# Altium PCB boost.PcbDoc
Units mm, origin at the board's own origin, x right, y up, seen from the top; angles counter-clockwise.
Board outline 84.96 x 55.75 mm, 2 copper layers (Top Layer, Bottom Layer); 34 components, 22 nets, 92 pads, 4 vias.
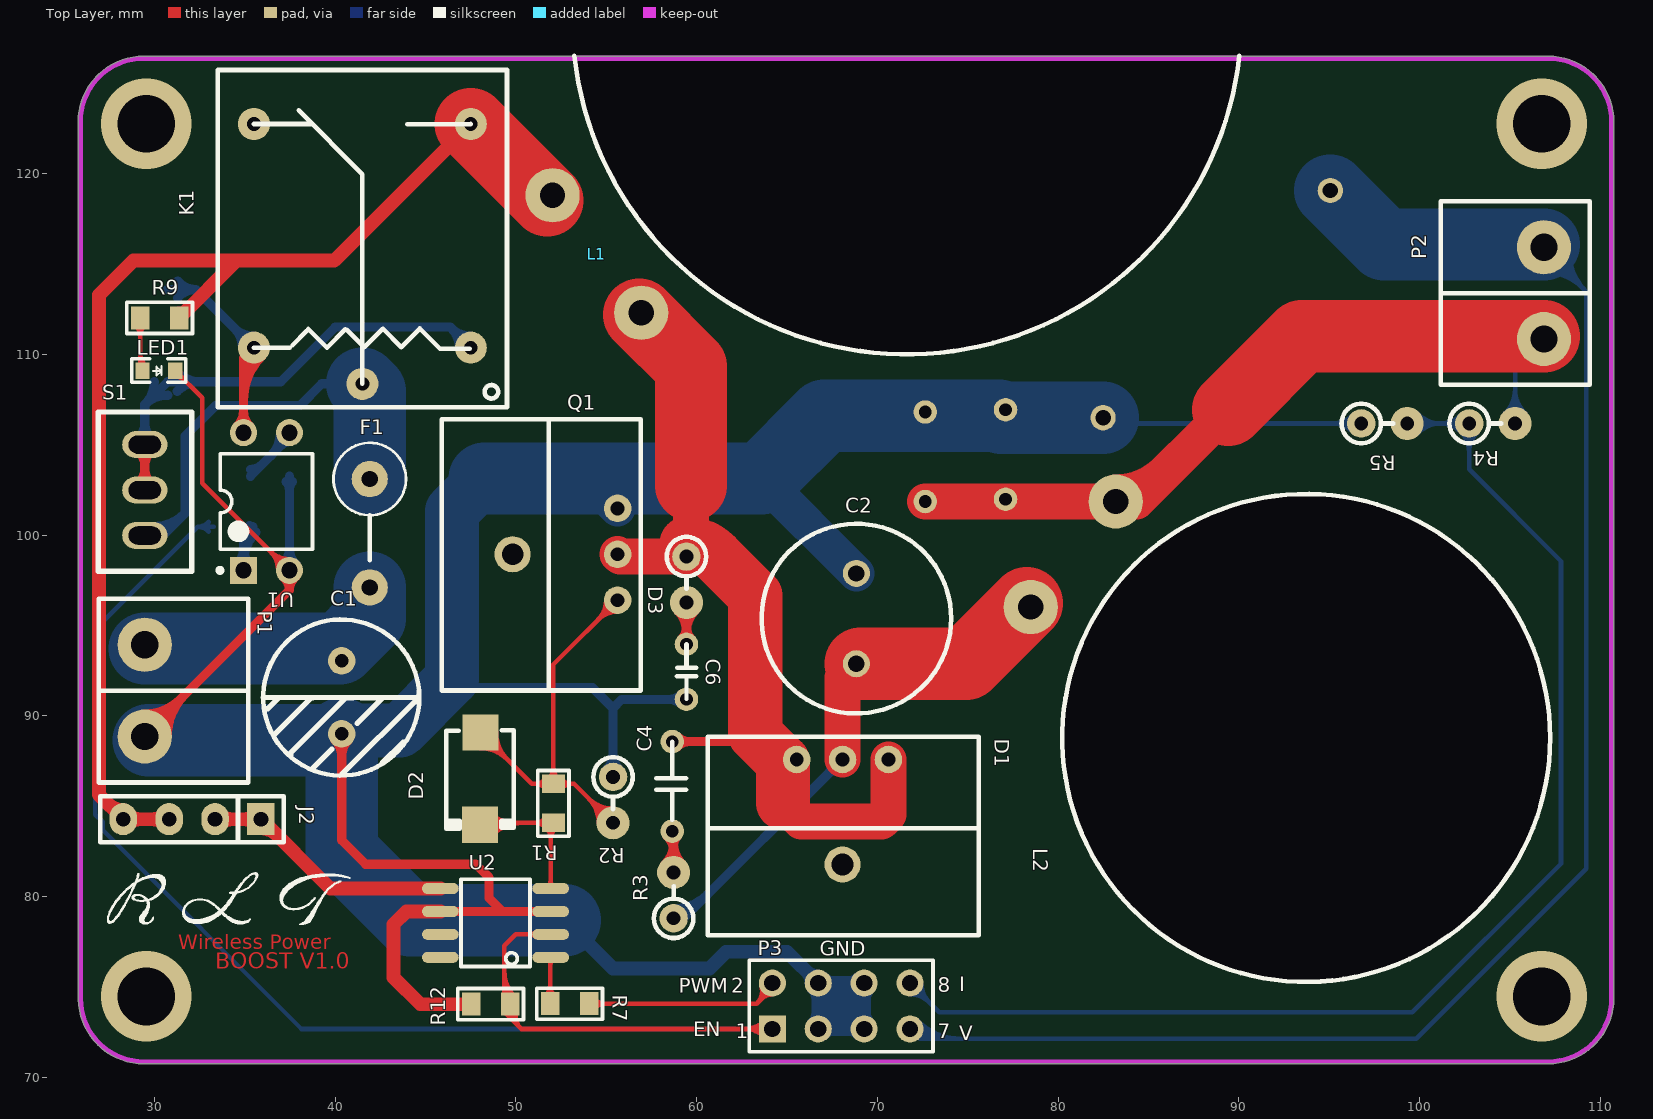
[diagram p0: Top Layer view]
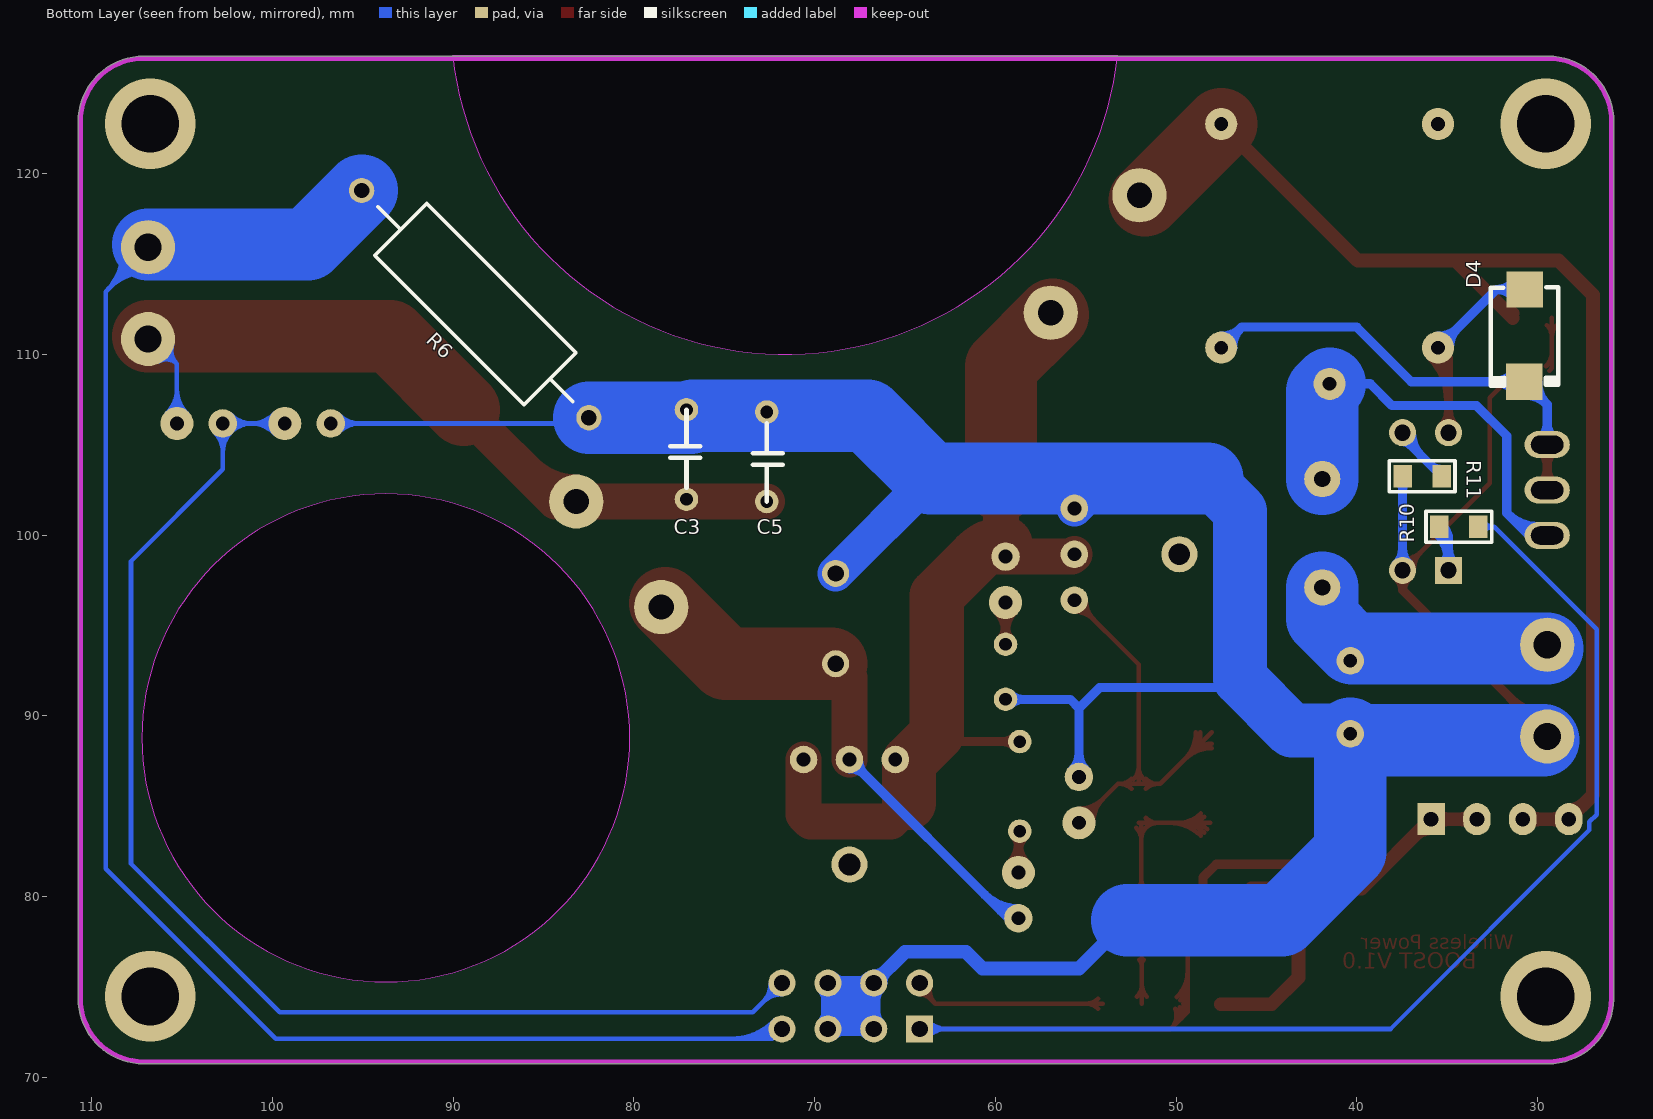
[diagram p1: Bottom Layer view, seen from below]
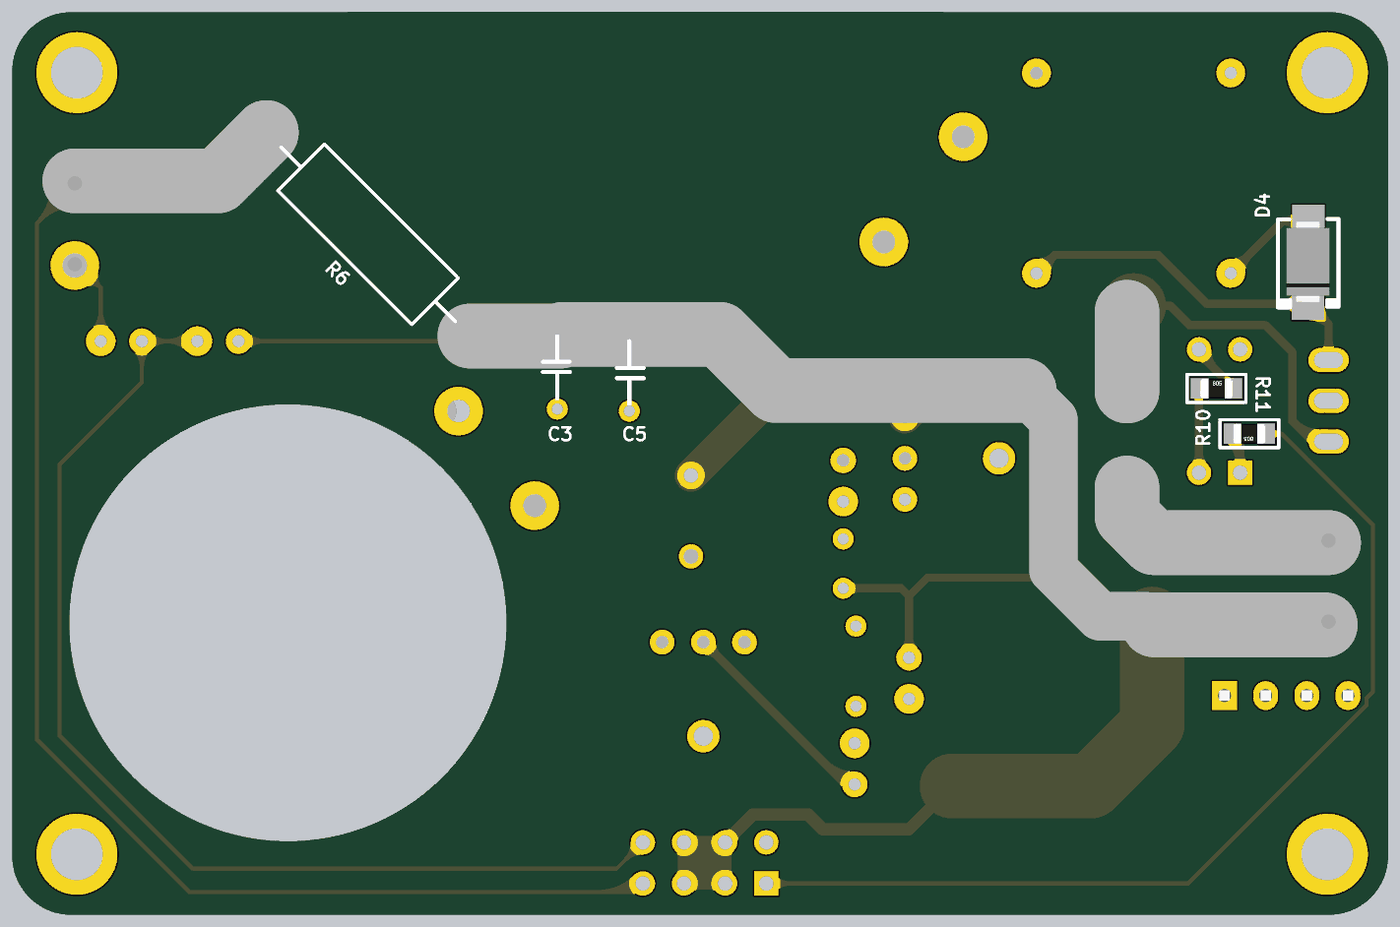
[diagram p2: 3D render of the assembled board from below, using the file's embedded part models]

## Layer stack, top to bottom
Top Solder: solder mask 0.0102, Solder Resist, Dk 3.5
Top Layer: signal copper 0.0356
Dielectric1: dielectric 0.32, FR-4, Dk 4.8
Bottom Layer: signal copper 0.0356
Bottom Solder: solder mask 0.0102, Solder Resist, Dk 3.5

## Board outline
25.781,74.359 25.781,122.86 cw(c25.907,122.872) 25.78,122.872 cw(c29.4,122.872) 29.4,126.493 cw(c29.4,126.366) 29.413,126.492 107.112,126.492 cw(c107.124,126.366) 107.124,126.493 cw(c107.124,122.872) 110.745,122.872 cw(c110.618,122.872) 110.744,122.86 110.744,74.371 cw(c110.618,74.358) 110.745,74.358 cw(c107.124,74.358) 107.124,70.738 cw(c107.124,70.865) 107.112,70.739 29.413,70.739 cw(c29.413,74.359) 25.793,74.304 cw(c25.908,74.359)

## Design rules (kind name [scope] priority, off if disabled: settings)
Clearance [All] p1: gap=0.254
PolygonConnect [All] p1: connectstyle=Relief reliefconductorwidth=0.254 reliefentries=4 polygonreliefangle="90 Angle" airgapwidth=0.254
RoutingVias [All] p1: holewidth=0.711 width=1.27 viastyle="Through Hole" minholewidth=0.711 minwidth=1.27 maxholewidth=0.711 maxwidth=1.27
SolderMaskExpansion [All] p1: expansion=0.102
Width [All] p1: maxlimit=5 minlimit=0.254 preferedwidth=0.254 minimp=50.000000 maximp=50.000000 favimp=50.000000
29 further rules are at their usual default settings.

## Classes and differential pairs
component class boost_sheet: C6 D2 D3 D4 F1 K1 L1 L2 Q1 R5 R6 R7 R9 R10 R12

## Components (designator, comment, footprint, x,y, rotation, side; value= is the part's Value field where it differs from the comment)
C1 "Cap Pol1" Elector_470uf_8*9/12*3mm 40.361,91.008 r270 top
C2 "Cap Pol1" RB5-10.5 68.834,95.377 r90 top
C3 "Cap" cb2 77.089,101.981 r90 bottom
C4 "Cap" CB2 58.649,83.617 r90 top
C5 "Cap" cb2 72.644,106.807 r270 bottom
C6 "Cap" CB1 59.436,90.907 r90 top
D1 "MBR20150" LM317带散热片 68.072,87.579 r0 top
D2 "SS14" SK34-SMB/DO-214AA 48.006,83.947 r90 top
D3 "IN4007" AXIAL0.1Z 59.436,98.806 r270 top
D4 "SS14" SK34-SMB/DO-214AA 30.734,108.458 r90 bottom
F1 "Fuse 1" FUSE-L 41.91,103.099 r90 top
J2 "CON4" SIP4 32.08,84.277 r180 top
K1 "HHC66A-1Z-12VDC" HHC66A-1Z-12VDC电位器 38.608,114.554 r180 top
L1 "Inductor" BOOST升压电感2 71.628,128.499 r0 top
L2 "Inductor" BOOST电路滤波电感 93.726,88.773 r270 top
LED1 "" 0603_LED 29.337,109.093 r0 top
P1 "VCC" 050-2 29.464,91.389 r90 top
P2 "VCC" 050-2 106.883,113.386 r270 top
P3 "Header 4X2" HDR2X4 64.186,72.669 r0 top
Q1 "IRFB4115PBF" LM317带散热片 55.626,98.933 r270 top
R1 "Res1" 0805r 52.07,84.074 r90 top
R2 "Res1" AXIAL0.1Z 55.372,86.614 r270 top
R3 "Res1" AXIAL0.1Z 58.725,78.791 r90 top
R4 "Res1" AXIAL0.1Z 102.743,106.172 r0 top
R5 "Res1" AXIAL0.1Z 96.774,106.172 r0 top
R6 "Res1" AXIAL-0.7 88.773,112.776 r225 bottom
R7 "Res1" 0805r 54.051,74.066 r180 top
R9 "2K" 0805R 29.21,112.014 r0 top
R10 "Res1" 0805R 33.274,100.457 r0 bottom
R11 "Res1" 0805R 37.465,103.251 r180 bottom
R12 "Res1" 0805R 47.523,74.041 r0 top
S1 "switch1" Switch_8.2*5.2 29.464,102.489 r180 top
U1 "Optoisolator1" DIP-4 36.195,101.854 r90 top
U2 "IR2184s" SO-8NB 48.844,78.537 r90 top

## Footprints (in the part's own frame and the unit in brackets; to place one, negate y for a bottom-side part, rotate by r counter-clockwise, add the part's x,y. Pads: shape width x height; smd on the part's side, far side on the other; paste and mask are expansions set on the pad)
050-2 [mm]
  round 3 hole 1.5: 1(-2.54,0) 2(2.54,0)
  silkscreen extent -5.08,-5.71 5.08,2.54, body extent -5.04,-5.5 4.96,2.5, height 11.2
0603_LED [mm]
  rect 0.8x0.9 smd: 1(0,0) 2(1.8,0)
  silkscreen extent -0.6,-0.65 2.4,0.65, body extent 0.05,-0.37 1.67,0.43, height 0.6
0805r [mil]
  rect 40x50 smd: 1(0,0) 2(85,0)
  silkscreen extent -29,-34 114,34, body extent 3,-25 82,25, height 30
0805R [mil]
  rect 40x50 smd: 1(0,0) 2(85,0)
  silkscreen extent -29,-34 114,34, body extent 3,-25 82,25, height 30
AXIAL0.1Z [mil]
  round 62 hole 30: 1(0,0)
  round 72 hole 30: 2(100,0)
  silkscreen extent -43,-43 70,43
AXIAL-0.7 [mm] "Axial Device, Thru-Hole; 2 Leads; 0.7 in Pin Spacing"
  round 1.4 hole 0.85: 1(-8.89,0) 2(8.89,0)
  silkscreen extent -7.62,-2.03 7.62,2.03
BOOST升压电感2 [mm]
  round 3 hole 1.4: 1(-19.6,-9.7) 2(-14.7,-16.2)
  Keep-Out Layer board cut-out: -18.394,-1.978 18.394,-1.978 15.321,-10.369 8.672,-16.341 0,-18.5 -8.672,-16.341 -15.321,-10.369 -18.394,-1.978
  silkscreen extent -18.39,-18.5 18.39,-1.98
BOOST电路滤波电感 [mm]
  round 3 hole 1.4: 1(-7.239,-15.24) 2(-13.081,-10.541)
  Keep-Out Layer board cut-out: 0,-13.5 -5.166,-12.472 -9.546,-9.546 -12.472,-5.166 -13.5,0 -13.5,0 -12.472,5.166 -9.546,9.546 -5.166,12.472 0,13.5 0,13.5 5.166,12.472 9.546,9.546 12.472,5.166 13.5,0 13.5,0 12.472,-5.166 9.546,-9.546 5.166,-12.472 0,-13.5
  silkscreen extent -13.5,-13.5 13.5,13.5
CB1 [mm]
  round 1.3 hole 0.7: 1(0,0) 2(3.048,0)
  silkscreen extent 0,-0.55 3.05,0.52
cb2 [mm]
  round 1.3 hole 0.7: 1(0,0) 2(4.953,0)
  silkscreen extent 0.64,-0.76 4.95,0.89
CB2 [mm]
  round 1.3 hole 0.7: 1(0,0) 2(4.953,0)
  silkscreen extent 0.64,-0.76 4.95,0.89
DIP-4 [mm] "DIP; 4 Leads; Row Spacing 7.62 mm; Pitch 2.54 mm"
  rect 1.5x1.5 hole 0.9: 1(-3.81,1.27)
  round 1.5 hole 0.9: 2(-3.81,-1.27) 3(3.81,-1.27) 4(3.81,1.27)
  silkscreen extent -3.93,-2.55 2.65,2.69, body extent -3.15,-2.5 3.15,2.5, height 5.6
Elector_470uf_8*9/12*3mm [mil]
  round 60 hole 30: 1(-80,0) 2(79,0)
  silkscreen extent -170,-171 170,169
FUSE-L [mil]
  round 79 hole 35.43: 1(-236.22,0) 2(0,0)
  silkscreen extent -177,-79 79,79, body extent -249,-74 78,83, height 545
HDR2X4 [mm] "Connector; Header; 4x2 Position"
  rect 1.5x1.5 hole 0.9: 1(0,0)
  round 1.5 hole 0.9: 2(0,2.54) 3(2.54,0) 4(2.54,2.54) 5(5.08,0) 6(5.08,2.54) 7(7.62,0) 8(7.62,2.54)
  silkscreen extent -1.27,-1.27 8.89,3.81
HHC66A-1Z-12VDC电位器 [mil]
  round 70 hole 30: 1(-113.98,243.62) 2(122.24,-322.36) 3(-350.2,-322.36) A(-350.2,164.88) B(122.24,164.88)
  silkscreen extent -429,-440 201,295
LM317带散热片 [mil]
  round 60 hole 30: 1(100,0) 2(0,0) 3(-100,0)
  round 78.74 hole 47.24: 4(0,-228.74)
  silkscreen extent -294,-383 297,50
RB5-10.5 [mm] "Capacitor (Radial); 2 Leads"
  round 1.5 hole 0.9: 1(-2.5,0) 2(2.5,0)
  silkscreen extent -5.25,-5.25 5.25,5.25
SIP4 [mil]
  rect 60x70 hole 32: 1(-150,0)
  oval 60x70 hole 32: 2(-50,0) 3(50,0) 4(150,0)
  silkscreen extent -200,-50 200,50, body extent -200,-50 200,50, height 336
SK34-SMB/DO-214AA [mm]
  rect 2x2 smd: 1(5.131,-0.025) 2(0.025,0)
  silkscreen extent -0.2,-1.88 5.26,1.85, body extent 0.06,-1.33 5.17,1.33, height 2.12
SO-8NB [mil]
  oval 24x80 smd: 1(-75,-121) 2(-25,-121) 3(25,-121) 4(75,-121) 5(75,119) 6(25,119) 7(-25,119) 8(-75,119)
  silkscreen extent -95,-76 95,74, body extent -97,-119 96,117, height 61
Switch_8.2*5.2 [mm]
  oval 2.5x1.5 hole 1 slot 1.8 at 0 deg: 1(0,2.515) 2(0,0) 2(0,-2.515)
  silkscreen extent -2.59,-4.32 2.57,4.5

## Part data
C1 C2: "Polarized Capacitor (Radial)"
C3: library part "Cap Pol1", "Polarized Capacitor (Radial)"
C4 C5 C6: "Capacitor"
D2 D3 D4: library part Diode, "Default Diode"
F1: "Fuse"
J2: "Connector"
LED1: library part LED2, "Typical RED, GREEN, YELLOW, AMBER GaAs LED"
P1 P2: library part POWER
P3: "Header, 4-Pin, Dual row"
R1 R2 R3 R4 R5 R6 R7 R10 R11 R12: "Resistor"
R9: library part RES
U1: "4-Pin Phototransistor Optocoupler"

## Via types
v1: diameter 5, hole 3.2, Top Layer to Bottom Layer, 4 vias

## Nets (pads, with @x,y where several pads share a name; then routed paths per layer and width w, separated by ;. In a path a pad name is that pad's centre, name@x,y a point inside that pad or via, vN(x,y) a via of type N, cw(c..) or ccw(c..) an arc to the next point about the centre after c; other vN are vias at no path point)
+12: J2.3 J2.4 K1.3 L1.1 R9.2 | length 73.3
  Top Layer w0.762: 27.403,85.144 ccw(c28.27,86.012) J2.4@28.27,84.785 ; J2.4@28.54,84.008 cw(c29.19,83.357) 29.19,84.277 cw(c29.19,85.197) J2.4@28.54,84.547 ; J2.3@30.541,84.008 ccw(c29.89,83.357) 29.89,84.277 ccw(c29.89,85.197) J2.3@30.541,84.547 ; J2.3 J2.4 26.924,85.623 26.924,113.284 28.829,115.189 34.544,115.189 ; R9.2 34.544,115.189 ; R9.2@31.369,112.268 ccw(c31.369,112.881) R9.2@31.803,112.448 ; K1.3@46.995,122.742 cw(c45.769,122.742) 46.636,121.875 cw(c47.503,121.008) K1.3@47.503,122.234 ; K1.3 39.95,115.189 34.544,115.189
  Top Layer w4: K1.3 L1.1@51.737,118.508
GND: C1.2 C2.2 C3.2 C5.1 C6.1 LED1.2 P1.1 P3.3 P3.4 P3.5 P3.6 Q1.3 R2.1 R5.1 R6.2 R11.1 R12.1 U1.2 U2.3 U2.6 | length 262.3
  Top Layer w0.254: LED1.2@31.137,108.77 cw(c31.137,107.99) 31.688,108.542 ; LED1.2 32.639,107.591 32.639,102.87 U1.2 ; LED1.2@31.41,109.043 ccw(c31.948,109.043) 31.568,108.662 ; U1.2@36.842,98.044 ccw(c35.338,98.044) 36.401,99.108 ccw(c37.465,100.171) U1.2@37.465,98.667 ; U1.2@37.096,98.044 ccw(c36.205,98.044) 36.835,98.674 ccw(c37.465,99.304) U1.2@37.465,98.413
  Top Layer w0.508: P1.1@29.464,89.587 ccw(c29.464,91.124) 30.55,90.037 ; P1.1@29.464,90.095 ccw(c29.464,92.858) 31.418,90.904 ; P1.1@29.629,88.849 29.629,89.116 37.465,96.952 ; P1.1@30.202,88.849 cw(c32.229,88.849) 30.796,90.282 ; P1.1@30.71,88.849 cw(c33.963,88.849) 31.663,91.15 ; U1.2@37.139,97.671 cw(c36.511,96.952) 37.465,96.952 ; U1.2 37.465,96.952 ; U1.2@37.791,97.671 ccw(c38.419,96.952) 37.465,96.952 ; C1.2@40.001,88.642 cw(c39.134,87.775) 40.361,87.775 cw(c41.587,87.775) C1.2@40.72,88.642 ; C1.2 40.361,83.109 41.681,81.788 47.777,81.788 48.514,81.051 48.514,79.908 49.251,79.172 ; U2.6 49.251,79.172 ; U2.3 49.251,79.172
  Top Layer w0.762: U2.6 43.942,79.172 43.231,78.461 43.231,75.514 44.704,74.041 R12.1
  Bottom Layer w0.254: R6.2 82.805,106.172 R5.1 ; R6.2@82.533,106.536 ccw(c83.411,107.414) 83.411,106.172 ; R6.2@82.712,106.715 ccw(c84.024,108.027) 84.024,106.172 ; R6.2@82.892,106.895 ccw(c84.637,108.64) 84.637,106.172 ; R5.1@96.307,105.705 ccw(c95.18,104.578) 95.18,106.172 ccw(c95.18,107.766) R5.1@96.307,106.639 ; R5.1@96.487,105.885 ccw(c95.793,105.191) 95.793,106.172 ccw(c95.793,107.153) R5.1@96.487,106.459
  Bottom Layer w0.508: U1.2@37.114,98.395 ccw(c36.268,99.241) 37.465,99.241 ccw(c38.662,99.241) U1.2@37.816,98.395 ; R11.1@37.285,102.944 cw(c36.852,102.511) 37.465,102.511 cw(c38.078,102.511) R11.1@37.645,102.944 ; U1.2 R11.1 ; 45.974,91.567 54.229,91.567 55.372,90.424 ; R2.1@54.995,86.991 ccw(c54.084,87.902) 55.372,87.902 ccw(c56.66,87.902) R2.1@55.749,86.991 ; R2.1 55.372,90.424 ; C6.1@59.156,90.627 ccw(c58.48,89.951) 58.48,90.907 ccw(c58.48,91.863) C6.1@59.156,91.187 ; C6.1 55.855,90.907 55.372,90.424
  Bottom Layer w0.762: 52.705,78.689 55.372,76.022 60.706,76.022 61.62,76.937 64.999,76.937 P3.4 ; P3.4@66.357,75.209 ccw(c65.466,75.209) 66.096,75.839 ccw(c66.726,76.469) P3.4@66.726,75.578 ; P3.3@66.465,72.93 ccw(c65.835,73.56) 66.726,73.56 ccw(c67.617,73.56) 66.987,72.93 ccw(c67.617,73.56) 67.617,72.669 ccw(c67.617,71.779) P3.3@66.987,72.408 ; P3.4@66.465,74.948 cw(c65.835,74.319) 66.726,74.319 cw(c67.617,74.319) 66.987,74.948 cw(c67.617,74.319) 67.617,75.209 cw(c67.617,76.1) P3.4@66.987,75.47 ; P3.5@69.005,72.408 ccw(c68.375,71.779) 68.375,72.669 ccw(c68.375,73.56) 69.005,72.93 ccw(c68.375,73.56) 69.266,73.56 ccw(c70.157,73.56) P3.5@69.527,72.93 ; P3.6@69.005,75.47 cw(c68.375,76.1) 68.375,75.209 cw(c68.375,74.319) 69.005,74.948 cw(c68.375,74.319) 69.266,74.319 cw(c70.157,74.319) P3.6@69.527,74.948 ; P3.4 P3.6 P3.5 P3.3 P3.4
  Bottom Layer w2: 53.975,103.124 Q1.3 ; 63.587,103.124 C2.2
  Bottom Layer w3: C1.2@40.767,89.179 43.586,89.179 46.457,92.05 46.457,101.321 48.26,103.124
  Bottom Layer w4: P1.1@29.667,88.646 C1.2@40.234,88.646 ; C1.2 40.361,82.474 44.145,78.689 52.705,78.689 ; 48.26,103.124 53.975,103.124 63.587,103.124 67.056,106.593 C3.2@76.748,106.593 ; C3.2@76.851,106.49 R6.2
NetC1_1: C1.1 F1.1 P1.2 | length 14.9
  Bottom Layer w4: P1.2@29.464,93.726 40.259,93.726 41.91,95.377 F1.1
NetC2_1: C2.1 D1.2 L2.1 R3.1 | length 34.8
  Top Layer w2: D1.2 68.072,92.115 ; 68.072,91.641 cw(c70.07,91.641) C2.1@68.657,93.054
  Top Layer w4: C2.1@69.063,92.877 74.915,92.877 L2.1@78.268,96.23
  Bottom Layer w0.508: R3.1 59.284,78.791 D1.2 ; R3.1@58.725,78.816 ccw(c58.725,80.227) 59.722,79.229 ; R3.1@58.725,79.324 ccw(c58.725,81.961) 60.589,80.097 ; D1.2@67.564,87.579 cw(c66.338,87.579) 67.205,86.712 cw(c68.072,85.845) D1.2@68.072,87.071
NetC3_1: C3.1 C5.2 L2.2 P2.2 R4.2 | length 55.7
  Top Layer w2: C5.2 L2.2 84.328,101.854 89.408,106.934 ; L2.2@83.185,102.354 ccw(c83.185,106.321) 85.99,103.516
  Top Layer w4: 89.408,106.934 93.472,110.998 P2.2@106.883,110.998
  Bottom Layer w0.254: R4.2@104.726,106.729 ccw(c103.382,108.073) 105.283,108.073 ccw(c107.184,108.073) R4.2@105.84,106.729 ; R4.2@104.906,106.549 ccw(c103.995,107.46) 105.283,107.46 ccw(c106.571,107.46) R4.2@105.66,106.549 ; R4.2 105.283,109.474 ; 105.529,109.72 cw(c106.039,109.21) P2.2@106.37,109.851 ; P2.2@105.557,110.492 cw(c104.537,110.22) 105.283,109.474 ; 105.595,109.786 ccw(c105.029,110.351) P2.2@105.802,110.557 ; P2.2@106.254,109.625 ccw(c105.872,108.885) 105.283,109.474 ; P2.2@106.909,111.1 105.283,109.474
NetC4_1: C4.1 R3.2 | length 6.3
  Top Layer w0.508: R3.2@58.258,81.798 ccw(c57.13,82.925) 58.725,82.925 ccw(c60.319,82.925) R3.2@59.192,81.798 ; C4.1@58.369,83.337 cw(c57.509,82.477) 58.725,82.477 ; C4.1 58.725,83.541 R3.2 ; 58.725,82.845 cw(c59.421,82.845) C4.1@58.929,83.337
NetC4_2: C4.2 D1.1 D1.3 D3.1 L1.2 Q1.2 | length 53.7
  Top Layer w0.508: C4.2 62.84,88.57 ; C4.2@58.929,88.29 cw(c59.605,87.614) 59.605,88.57 cw(c59.605,89.526) C4.2@58.929,88.85
  Top Layer w2: Q1.2 55.753,98.806 D3.1 61.087,98.806 ; D3.1@59.69,99.06 59.69,102.743 ; 64.77,85.166 65.786,84.15 70.231,84.15 70.612,84.531 D1.1
  Top Layer w3: 61.087,98.806 63.246,96.647 63.246,88.976 64.77,87.452 64.77,85.166 ; D3.1@59.436,99.519 cw(c59.436,97.253) 61.038,98.855 ccw(c59.436,97.253) D3.1@59.436,99.519
  Top Layer w4: L1.2@56.821,112.191 59.69,109.322 59.69,102.743
NetC6_2: C6.2 D3.2 | length 6.3
  Top Layer w0.508: D3.2@58.969,95.799 cw(c57.842,94.672) 59.436,94.672 cw(c61.03,94.672) D3.2@59.903,95.799 ; C6.2@59.156,94.235 ccw(c58.48,94.911) 59.436,94.911 ccw(c60.392,94.911) C6.2@59.716,94.235 ; C6.2 D3.2
NetD2_1: D2.1 Q1.1 R1.2 R2.2 | length 39.9
  Top Layer w0.254: D2.1@48.031,88.205 cw(c48.031,86.097) 49.522,87.587 cw(c51.012,89.078) D2.1@48.904,89.078 ; D2.1@48.031,88.459 cw(c48.031,86.964) 49.088,88.021 cw(c50.145,89.078) D2.1@48.65,89.078 ; D2.1 50.876,86.233 R1.2 ; R1.2@51.674,85.964 ccw(c51.023,85.313) 51.023,86.233 ccw(c51.023,87.153) R1.2@51.674,86.502 ; R1.2@51.801,86.502 ccw(c51.15,87.153) 52.07,87.153 ccw(c52.99,87.153) R1.2@52.339,86.502 ; R1.2@52.466,85.964 cw(c53.117,85.313) 53.117,86.233 cw(c53.117,87.153) R1.2@52.466,86.502 ; R2.2@54.585,84.074 ccw(c52.684,84.074) 54.028,85.418 ccw(c55.372,86.762) R2.2@55.372,84.861 ; R2.2@54.839,84.074 ccw(c53.551,84.074) 54.461,84.985 ccw(c55.372,85.895) R2.2@55.372,84.607 ; Q1.1@54.991,96.393 cw(c53.458,96.393) 54.542,95.309 cw(c55.626,94.225) Q1.1@55.626,95.758 ; Q1.1@55.245,96.393 cw(c54.325,96.393) 54.976,95.743 cw(c55.626,95.092) Q1.1@55.626,96.012 ; R2.2 53.213,86.233 R1.2 ; Q1.1 52.07,92.837 R1.2
NetD2_2: D2.2 R1.1 U2.4 | length 17.6
  Top Layer w0.254: D2.2@48.108,84.074 R1.1 ; D2.2@48.264,83.714 cw(c49.132,82.846) 49.132,84.074 ; D2.2@48.444,83.535 cw(c49.746,82.233) 49.746,84.074 ; D2.2@48.444,84.41 ccw(c49.255,85.222) 49.255,84.074 ; D2.2@48.623,83.355 cw(c50.359,81.62) 50.359,84.074 ; D2.2@48.623,84.59 ccw(c49.868,85.835) 49.868,84.074 ; R1.1@51.674,84.343 cw(c51.023,84.994) 51.023,84.074 cw(c51.023,83.154) 51.674,83.805 cw(c51.085,83.216) 51.918,83.216 ; U2.4@51.792,80.568 ccw(c51.488,80.871) 51.918,80.871 ccw(c52.347,80.871) U2.4@52.043,80.568 ; U2.4 R1.1@51.918,83.922 ; 51.918,83.093 cw(c52.924,83.093) R1.1@52.212,83.805
NetD4_1: D4.1 K1.B U1.4 | length 21.4
  Top Layer w0.508: U1.4@34.574,106.015 ccw(c33.728,106.861) 34.925,106.861 ccw(c36.122,106.861) U1.4@35.276,106.015 ; U1.4 K1.B@34.925,109.788 ; 34.925,107.438 cw(c38.431,107.438) K1.B@35.952,109.917 ; 34.925,108.664 cw(c37.205,108.664) K1.B@35.593,110.276
  Bottom Layer w0.508: D4.1 32.28,113.589 ; D4.1@31.287,113.117 cw(c32.28,112.306) 32.28,113.589 ; D4.1@31.287,114.06 ccw(c32.28,114.871) 32.28,113.589 ; K1.B@34.868,110.366 ccw(c33.335,110.366) 34.419,111.45 ccw(c35.503,112.534) K1.B@35.503,111.001 ; K1.B 32.28,113.589
NetD4_2: D4.2 K1.A S1.2 | length 38.7
  Top Layer w0.508: S1.2@29.113,102.84 ccw(c28.267,103.686) 29.464,103.686 ccw(c30.661,103.686) S1.2@29.815,102.84 ; S1.2@29.113,104.653 cw(c28.267,103.806) 29.464,103.806 cw(c30.661,103.806) S1.2@29.815,104.653 ; S1.2@29.464,102.489 S1.2@29.464,105.004
  Bottom Layer w0.508: S1.2@29.113,105.354 ccw(c28.267,106.201) 29.464,106.201 ccw(c30.661,106.201) S1.2@29.815,105.354 ; S1.2@29.464,105.004 29.464,107.213 ; D4.2@29.988,108.482 cw(c28.199,108.478) 29.464,107.213 ; D4.2@30.733,107.737 ccw(c30.729,105.949) 29.464,107.213 ; D4.2@31.262,107.956 cw(c32.535,106.682) 32.535,108.483 cw(c32.535,110.284) D4.2@31.262,109.011 ; K1.A@46.868,110.366 ccw(c45.335,110.366) 46.419,111.45 ccw(c47.503,112.534) K1.A@47.503,111.001 ; K1.A 46.363,111.506 40.005,111.506 36.982,108.483 D4.2 29.464,107.213
NetF1_2: F1.2 K1.1 S1.1 | length 28.6
  Bottom Layer w0.508: S1.1 30.455,99.974 31.699,101.219 31.699,105.486 33.376,107.163 38.049,107.163 39.253,108.366 K1.1 ; S1.1@29.964,99.962 ccw(c29.964,101.118) 30.781,100.301 ; S1.1@29.964,100.47 ccw(c29.964,102.852) 31.648,101.168 ; K1.1@41.054,107.917 ccw(c39.97,106.833) 39.97,108.366 ccw(c39.97,109.899) K1.1@41.054,108.815
  Bottom Layer w4: K1.1 41.91,107.959 F1.2
NetLED1_1: LED1.1 R9.1 | length 5.3
  Top Layer w0.254: R9.1@28.941,111.618 cw(c28.29,110.967) 29.21,110.967 cw(c30.13,110.967) R9.1@29.479,111.618 ; 29.21,110.109 ccw(c30.303,110.109) LED1.1@29.53,109.336 ; R9.1 29.21,109.22 LED1.1
NetP2_2: P2.1 P3.7 R6.1 | length 112.5
  Bottom Layer w0.254: P3.7@71.708,72.571 ccw(c72.758,73.622) 72.758,72.136 ; P3.7 72.339,72.136 99.822,72.136 109.22,81.534 109.22,113.462 ; P3.7@71.887,72.751 ccw(c73.371,74.235) 73.371,72.136 ; P3.7@72.067,72.93 ccw(c73.984,74.848) 73.984,72.136 ; P3.7@72.246,73.11 ccw(c74.598,75.461) 74.598,72.136 ; P2.1@105.816,116.865 109.22,113.462 ; P2.1@106.883,114.553 cw(c106.883,111.544) 109.01,113.672 ; P2.1@106.883,114.807 cw(c106.883,112.412) 108.577,114.105 ; P2.1@106.883,115.061 cw(c106.883,113.279) 108.143,114.539 ; P2.1@107.494,115.908 ccw(c109.119,115.862) 107.97,114.712 ; P2.1@107.748,115.901 ccw(c109.93,115.839) 108.386,114.295 ; P2.1@108.002,115.894 ccw(c110.74,115.816) 108.803,113.879 ; P2.1@108.256,115.887 ccw(c111.551,115.793) 109.22,113.462
  Bottom Layer w4: R6.1 98.043,116.078 P2.1@106.883,116.078
NetP3_1: P3.1 R10.1 R12.2 U2.2 | length 99.4
  Top Layer w0.254: R12.2@49.352,74.659 ccw(c50.173,74.659) R12.2@49.593,74.078 ; 49.352,75.272 ccw(c50.786,75.272) R12.2@49.772,74.258 ; 49.352,75.885 ccw(c51.399,75.885) R12.2@49.952,74.437 ; R12.2@49.563,73.957 ccw(c50.212,73.725) 49.725,73.237 ; R12.2@49.802,73.871 ccw(c50.63,73.575) 50.008,72.953 ; R12.2@50.041,73.786 ccw(c51.048,73.426) 50.292,72.669 ; U2.2@51.081,77.776 ccw(c50.777,77.473) 50.777,77.902 ccw(c50.777,78.331) U2.2@51.081,78.028 ; U2.2 49.987,77.902 49.352,77.267 49.352,73.609 50.292,72.669 ; P3.1@63.745,72.229 ccw(c62.682,71.165) 62.682,72.669 ccw(c62.682,74.173) P3.1@63.745,73.11 ; P3.1@63.925,72.408 ccw(c63.295,71.779) 63.295,72.669 ccw(c63.295,73.56) P3.1@63.925,72.93 ; P3.1 50.292,72.669
  Bottom Layer w0.254: R10.1@32.998,100.194 ccw(c32.385,99.61) 32.385,100.457 ; R10.1@32.998,100.72 cw(c32.385,101.304) 32.385,100.457 ; R10.1 32.385,100.457 ; P3.1@63.745,72.229 ccw(c62.682,71.165) 62.682,72.669 ccw(c62.682,74.173) P3.1@63.745,73.11 ; P3.1@63.925,72.408 ccw(c63.295,71.779) 63.295,72.669 ccw(c63.295,73.56) P3.1@63.925,72.93 ; P3.1 38.135,72.669 27.127,83.677 27.127,84.125 26.721,84.531 26.721,94.793 32.385,100.457
NetP3_2: P3.2 R7.1 | length 15
  Top Layer w0.254: R7.1 63.322,74.066 ; R7.1@54.321,73.797 cw(c54.971,73.147) 54.971,74.066 cw(c54.971,74.986) R7.1@54.321,74.336 ; P3.2@63.584,75.047 cw(c62.605,74.783) 63.322,74.066 ; 63.599,74.343 cw(c64.186,73.757) P3.2@64.186,74.586 ; 63.633,74.377 ccw(c63.095,74.915) P3.2@63.83,75.113 ; P3.2@64.186,74.93 63.322,74.066
  Top Layer w0.508: P3.2@64.186,74.93 P3.2@64.186,75.489
NetP3_8: P3.8 R4.1 R5.2 | length 86.9
  Bottom Layer w0.254: P3.8@71.806,74.586 cw(c71.806,73.082) 72.869,74.146 cw(c73.933,75.209) P3.8@72.429,75.209 ; P3.8@71.806,74.84 cw(c71.806,73.95) 72.436,74.579 cw(c73.066,75.209) P3.8@72.175,75.209 ; P3.8 73.431,73.584 99.593,73.584 107.823,81.813 107.823,98.552 102.743,103.632 R4.1 R5.2 ; R5.2@99.691,105.795 cw(c100.602,104.884) 100.602,106.172 cw(c100.602,107.46) R5.2@99.691,106.549 ; R5.2@99.871,105.615 cw(c101.215,104.271) 101.215,106.172 cw(c101.215,108.073) R5.2@99.871,106.729 ; R4.1@102.276,106.639 cw(c101.149,107.766) 101.149,106.172 cw(c101.149,104.578) 102.276,105.705 cw(c101.149,104.578) 102.743,104.578 cw(c104.337,104.578) R4.1@103.21,105.705 ; R4.1@102.456,106.459 cw(c101.762,107.153) 101.762,106.172 cw(c101.762,105.191) 102.456,105.885 cw(c101.762,105.191) 102.743,105.191 cw(c103.724,105.191) R4.1@103.03,105.885
NetR7_2: R7.2 U2.1 | length 4.7
  Top Layer w0.254: R7.2@51.623,74.463 ccw(c50.972,75.113) 51.892,75.113 ccw(c52.812,75.113) R7.2@52.162,74.463 ; U2.1@51.792,76.506 cw(c51.55,76.264) 51.892,76.264 ; R7.2 U2.1@51.892,76.606 ; 51.892,76.141 cw(c52.408,76.141) U2.1@52.043,76.506
NetR10_2: R10.2 U1.1 | length 7.2
  Bottom Layer w0.508: U1.1@34.574,98.395 ccw(c33.728,99.241) 34.925,99.241 ccw(c36.122,99.241) U1.1@35.276,98.395 ; U1.1 34.925,99.949 R10.2 ; U1.1@34.925,98.49 cw(c37.273,98.49) R10.2@35.613,100.15 ; 34.925,99.717 cw(c36.046,99.717) R10.2@35.253,100.51
NetR11_2: R11.2 U1.3 | length 5.9
  Bottom Layer w0.508: R11.2 37.465,105.41 U1.3 ; R11.2@35.306,103.632 ccw(c35.306,104.552) 35.956,103.901 ; 36.439,104.384 ccw(c35.158,105.664) U1.3@36.969,105.664 ; 37.052,104.997 cw(c37.465,104.584) U1.3@37.465,105.168
VCC: J2.1 J2.2 U2.5 | length 17.9
  Top Layer w0.762: J2.2 J2.1 39.726,80.442 U2.5 ; J2.2@33.62,84.008 cw(c34.27,83.357) 34.27,84.277 cw(c34.27,85.197) J2.2@33.62,84.547 ; J2.1@35.621,84.008 ccw(c34.97,83.357) 34.97,84.277 ccw(c34.97,85.197) J2.1@35.621,84.547 ; J2.1@35.89,83.769 cw(c35.89,82.543) 36.757,83.41
pads on no net: D1.4 K1.2 Q1.4 U2.7 U2.8
copper on no net:
  other v1: 29.54,74.473 106.756,74.473 29.54,122.758 106.756,122.758

## Keep-outs
Keep-Out Layer:
  lines w0.254: 25.908,74.359 25.908,122.872 cw(c29.4,122.872) 29.4,126.366 107.125,126.365 cw(c107.124,122.872) 110.618,122.872 110.617,74.32 ; 25.92,74.359 ccw(c29.413,74.359) 29.413,70.866 107.163,70.866 ; 107.124,70.865 ccw(c107.124,74.358) 110.618,74.358

## Other copper
Top Layer:
  text "Wireless Power" at 31.318,77.089 h0.8
  text "BOOST V1.0" at 33.35,75.692 h1.52
Bottom Layer:
  rectangle net GND: 66.726,72.669 69.266,75.209

## Silkscreen, mask and mechanical layers (free items; w line width, h text height)
Top Overlay:
  drawing of 784 lines, arcs and shapes, not listed
  text "GND" at 66.802,76.708 h0.8
  text "I" at 74.524,74.752 h0.8
  text "PWM" at 59.004,74.676 h0.8
  text "EN" at 59.817,72.263 h0.8
  text "V" at 74.524,72.034 h0.8
Top Solder:
  text "Wireless Power" at 31.318,77.089 h0.8
  text "BOOST V1.0" at 33.35,75.692 h1.52

## Dimensions
25.908,74.359 to 110.617,74.32 on Mechanical 13
107.125,126.365 to 107.163,70.866 on Mechanical 13

## Text inside footprints (layer, text, board x,y; h text height)
P3: Top Overlay "2" at 61.925,74.676 h0.8; Top Overlay "1" at 62.154,72.161 h0.8; Top Overlay "7" at 73.33,72.161 h0.8; Top Overlay "8" at 73.33,74.701 h0.8